# Altium PCB Layout_Power_Supply_V2.PcbDoc
Units mm, origin at the board's own origin, x right, y up, seen from the top; angles counter-clockwise.
Board outline 24.89 x 34.29 mm, 2 copper layers (Top Layer, Bottom Layer); 26 components, 17 nets, 78 pads, 28 vias.
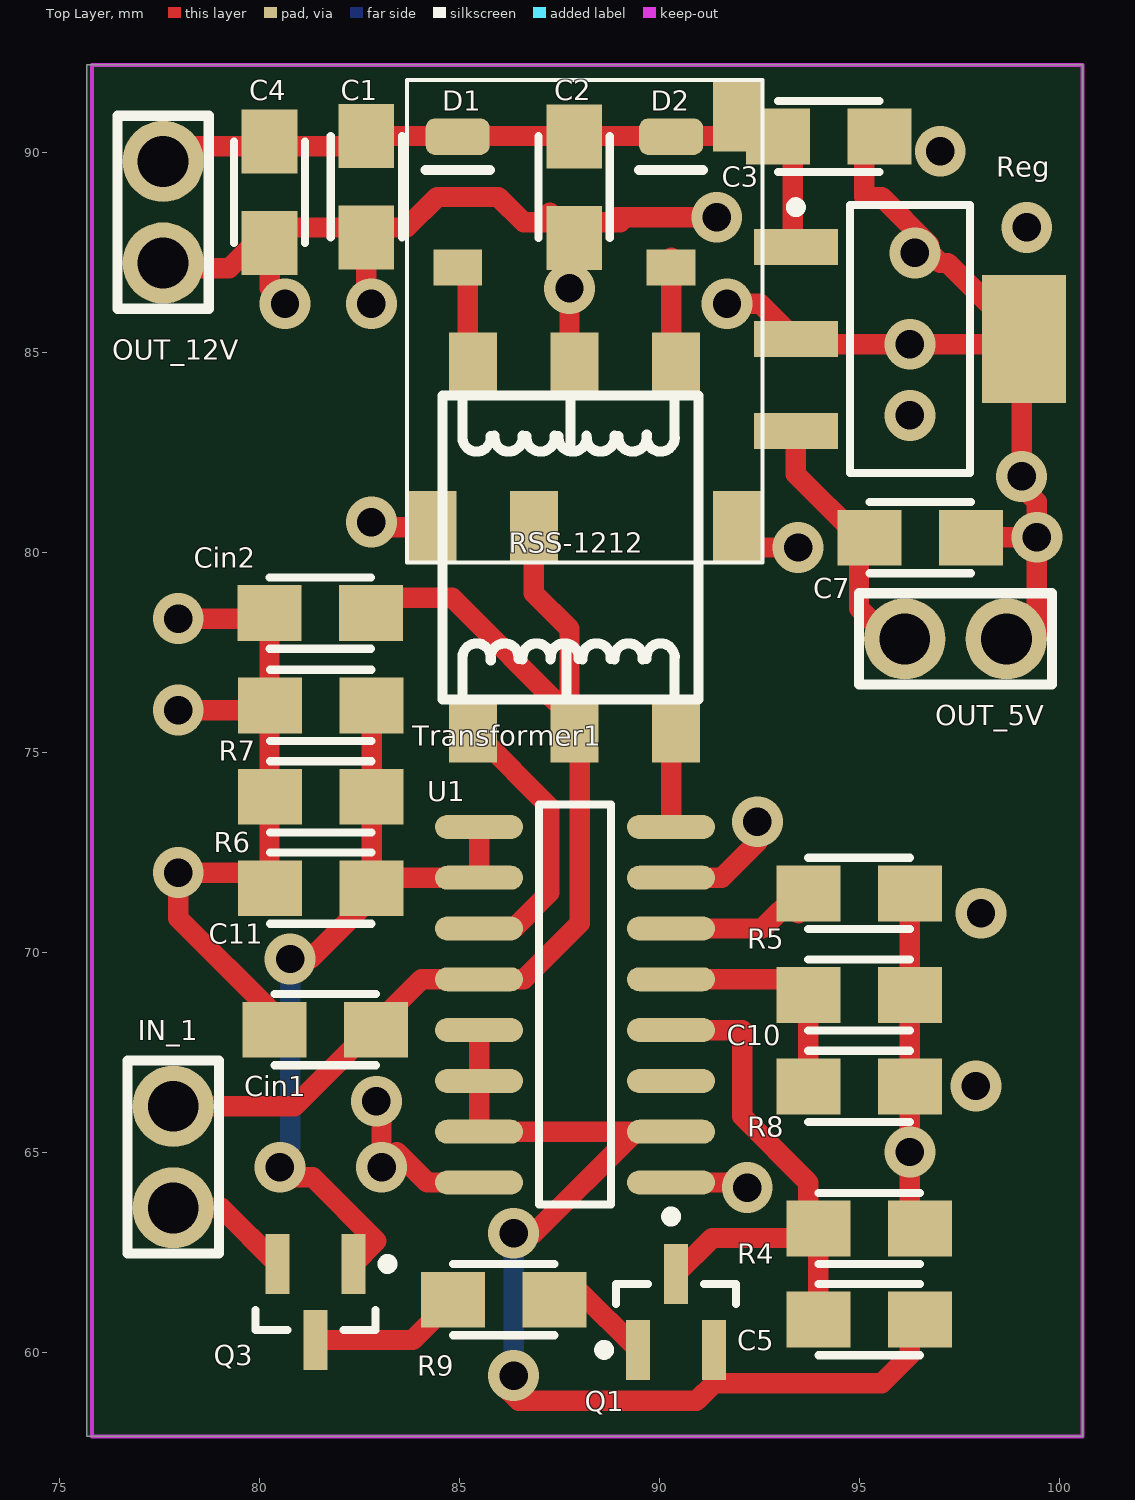
[diagram p0: Top Layer view]
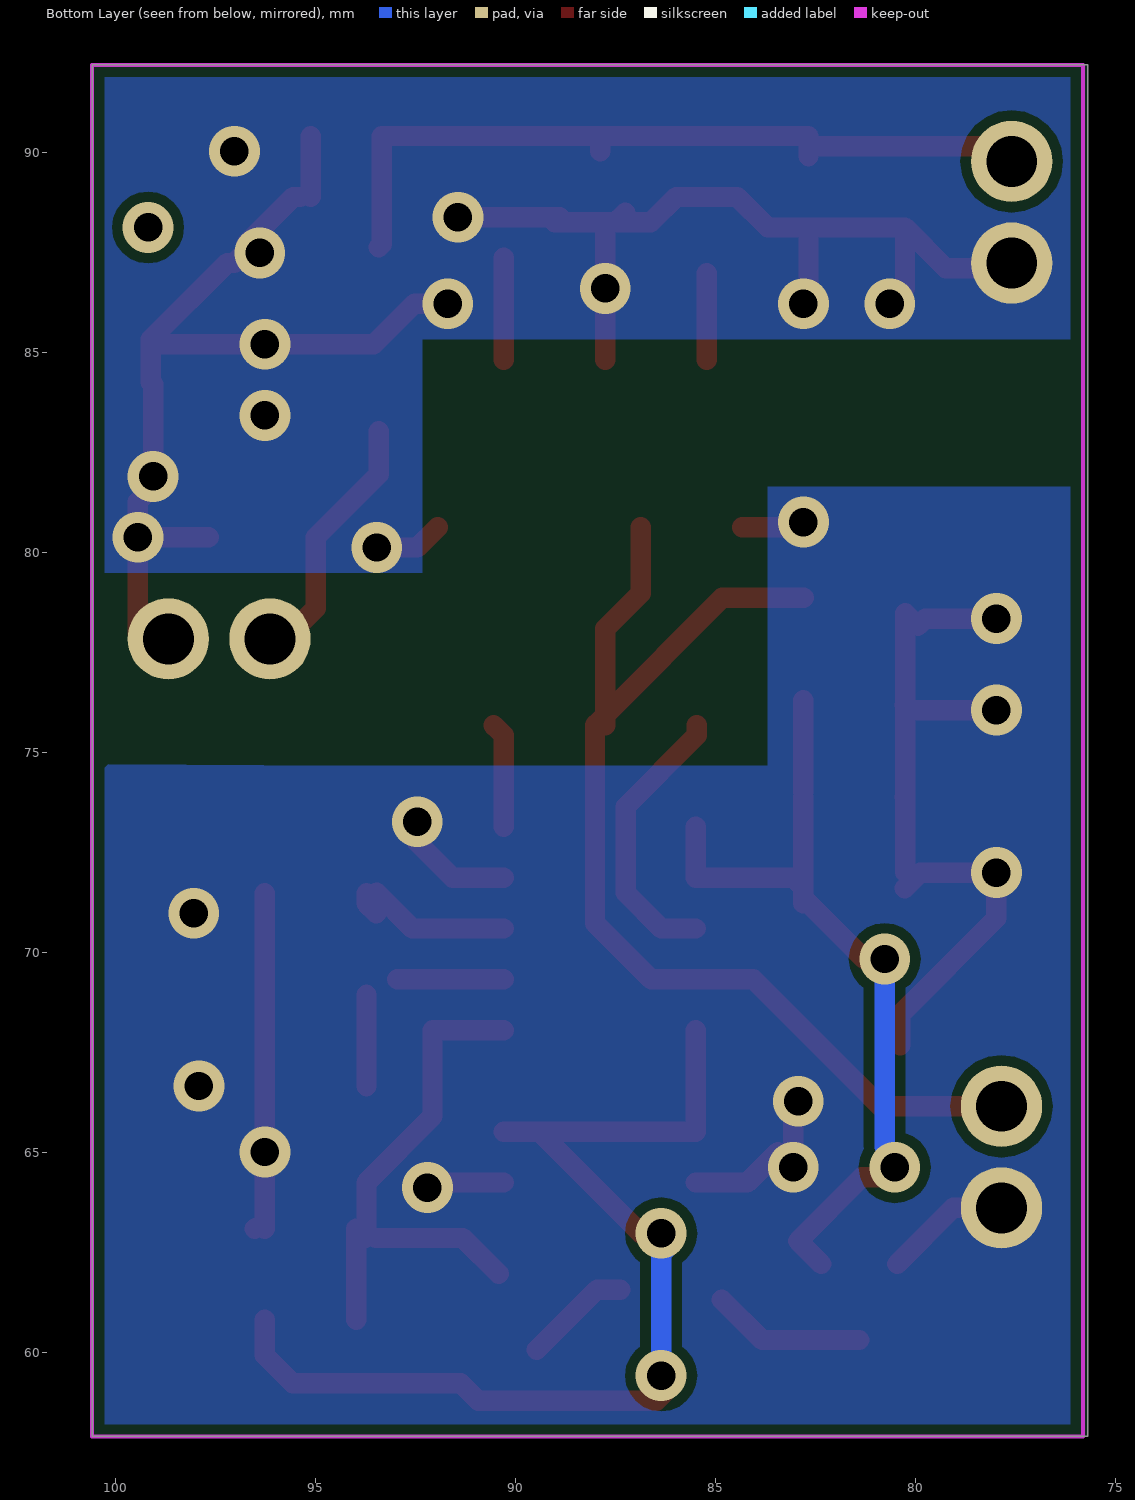
[diagram p1: Bottom Layer view, seen from below]

## Layer stack, top to bottom
Top Solder: solder mask 0.0102, Solder Resist, Dk 3.5
Top Layer: signal copper 0.0356
Dielectric 1: dielectric 0.32, FR-4, Dk 4.8
Bottom Layer: signal copper 0.0356
Bottom Solder: solder mask 0.0102, Solder Resist, Dk 3.5

## Board outline
75.692,57.912 100.584,57.912 100.584,92.202 75.692,92.202

## Design rules (kind name [scope] priority, off if disabled: settings)
Clearance [All] p1: gap=0.254
PlaneClearance PlaneClearance_1 [All] p1: clearance=0.508
PlaneClearance [InNet('GND_IN') And OnLayer('Bottom Layer')] p2: clearance=0.5
PlaneConnect [All] p1: planeconnectstyle=Direct reliefexpansion=0.508 reliefentries=4 reliefconductorwidth=0.254 reliefairgap=0.254
PolygonConnect [All] p1: connectstyle=Direct reliefconductorwidth=0.254 reliefentries=4 polygonreliefangle="90 Angle" airgapwidth=0.254
RoomDefinition Conectors_IsolatedSupply [InComponentClass('Conectors_IsolatedSupply')] p1: confinementstyle=ConfineIn formatcopy=TRUE lockcomponents=FALSE outline 0,25.654 371.602,25.654 371.602,217.687 0,217.687
RoomDefinition isolatedSupply [InComponentClass('isolatedSupply')] p2: confinementstyle=ConfineIn formatcopy=TRUE lockcomponents=FALSE outline 26.035,26.162 332.994,26.162 332.994,126.873 26.035,126.873
RoutingVias [All] p1: holewidth=0.711 width=1.27 viastyle="Through Hole" minholewidth=0.711 minwidth=1.27 maxholewidth=0.711 maxwidth=1.27
SolderMaskExpansion [All] p1: expansion=0.102
Width [All] p1: maxlimit=0.52 minlimit=0.5 preferedwidth=0.51 minimp=50.000000 maximp=50.000000 favimp=50.000000
28 further rules are at their usual default settings.

## Classes and differential pairs
component class Conectors_IsolatedSupply: IN_1 OUT_5V OUT_12V

## Components (designator, comment, footprint, x,y, rotation, side; value= is the part's Value field where it differs from the comment)
C1 "Capacitor_nao_polarizado" 0805_W 82.686,89.161 r270 top
C2 "Capacitor_polarizado" 0805_W 87.884,89.154 r270 top
C3 "Capacitor_nao_polarizado" 0805_W 94.233,90.424 r0 top
C4 "Capacitor_nao_polarizado" 0805_W 80.264,89.028 r270 top
C5 "Cap_0805" 0805_W 95.257,60.824 r180 top
C7 "Capacitor_nao_polarizado" 0805_W 96.52,80.391 r0 top
C10 "Cap_0805" 0805_W 94.989,68.961 r0 top
C11 "Cap_0805" 0805_W 81.534,71.628 r0 top
Cin1 "Cap_0805" 0805_W 81.661,68.072 r180 top
Cin2 "Cap_0805" 0805_W 81.534,78.486 r180 top
D1 "B2-SMD" SOD-123 84.963,88.773 r90 top
D2 "B2-smd" SOD-123 90.297,88.773 r90 top
IN_1 "Header 2" Header2 77.851,63.627 r90 top
OUT_5V "Header 2" Header2 98.679,77.851 r180 top (schematic designator OUT_2)
OUT_12V "Header 2" Header2 77.597,87.249 r90 top (schematic designator OUT_1)
Q1 "BC857" SOT-23-TT3_N 90.424,61.026 r90 top
Q3 "BC847" SOT-23-TT3_N 81.407,61.275 r270 top
R4 "Res_0805" 0805_W 95.257,63.1 r180 top
R5 "Res_0805" 0805_W 95.003,71.482 r180 top
R6 "Res_0805" 0805_W 81.534,73.914 r0 top
R7 "Res_0805" 0805_W 81.534,76.2 r0 top
R8 "Res_0805" 0805_W 95.003,66.656 r180 top
R9 "Res_0805" 0805_W 86.106,61.341 r0 top
Reg "LM7805" SOT223 96.266,85.344 r0 top
Transformer1 "WE-PP" Trafo 87.884,80.137 r90 top
U1 "TL494ID" SOIC16_N 87.897,68.707 r180 top

## Footprints (in the part's own frame and the unit in brackets; to place one, negate y for a bottom-side part, rotate by r counter-clockwise, add the part's x,y. Pads: shape width x height; smd on the part's side, far side on the other; paste and mask are expansions set on the pad)
0805_W [mm]
  rect 1.6x1.397 smd: 1(-1.263,-0.009) 2(1.277,-0.009)
  silkscreen extent -1.26,-0.9 1.28,0.88
Header2 [mil]
  round 80 hole 50: 1(0,0) 2(100,0)
  silkscreen extent -45,-45 145,45
SOD-123 [mm] "Diodo"
  rect 0.91x1.22 smd: 1(-1.635,0)
  rrect50% 0.91x1.6 smd: 2(1.635,0)
  silkscreen extent 0.8,-0.8 0.8,0.8
SOIC16_N [mm] "SOIC, 16-Leads, Body 9.9x3.9mm, Pitch 1.27mm, IPC Medium Density"
  oval 2.2x0.6 smd: 1(-2.4,4.445) 2(-2.4,3.175) 3(-2.4,1.905) 4(-2.4,0.635) 5(-2.4,-0.635) 6(-2.4,-1.905) 7(-2.4,-3.175) 8(-2.4,-4.445) 9(2.4,-4.445) 10(2.4,-3.175) 11(2.4,-1.905) 12(2.4,-0.635) 13(2.4,0.635) 14(2.4,1.905) 15(2.4,3.175) 16(2.4,4.445)
  silkscreen extent -2.53,-5 0.9,5.42, body extent -2,-5 2,5, height 1.91
SOT223 [mm] "large"
  rect 2.1x0.9 smd: 1(-2.85,0) 2(-2.85,-2.3) 3(-2.85,2.3)
  rect 2.1x3.2 smd: 1(2.85,0)
  silkscreen extent -2.97,-3.35 1.5,3.42, body extent -1.85,-3.35 1.85,3.35, height 1.7
SOT-23-TT3_N [mm] "SOT23, 3-Leads, Body 2.9x1.3mm, Pitch 0.95mm, Lead Span 2.4mm, IPC Medium Density"
  rect 1.5x0.6 smd: 1(-0.95,0.95) 2(-0.95,-0.95) 3(0.95,0)
  silkscreen extent -1.07,-1.5 0.7,1.92, body extent -0.7,-1.5 0.7,1.5, height 1.12
Trafo [mm] "transformador smd TI"
  rect 1.6x1.2 smd: 1(-4.57,2.54) 2(-4.57,0) 3(-4.57,-2.54) 4(4.57,-2.54) 5(4.57,0) 6(4.57,2.54)
  silkscreen extent -3.8,-3.1 3.8,3.3

## Part data
C1 C3 C4 C7: "Capacitor nao polarizado"
C2: "Capacitor polarizado"
C5 C10 C11 Cin1 Cin2: "Capacitor"
D1 D2: library part Schottky, "Diodo Schottky"
IN_1 OUT_5V OUT_12V: "Header, 2-Pin"
Q1: "PNP General-purpose Transistor"
Q3: "NPN General-purpose Transistor"
R4 R5 R6 R7 R8 R9: "Resistor"
Transformer1: library part Trafo-TI
U1: "Pulse-Width-Modulation Control Circuit"

## Free pads (board coordinates)
  rect 1.2x1.8 smd: 2(91.948,90.932) 3(91.948,80.645) 4(86.868,80.645) 5(84.328,80.645)

## Via types
v1: diameter 1.27, hole 0.711, Top Layer to Bottom Layer, 28 vias

## Nets (pads, with @x,y where several pads share a name; then routed paths per layer and width w, separated by ;. In a path a pad name is that pad's centre, name@x,y a point inside that pad or via, vN(x,y) a via of type N, cw(c..) or ccw(c..) an arc to the next point about the centre after c; other vN are vias at no path point)
5V_REF: C5.1 Q1.2 U1.2 U1.13 U1.14 U1.15 | length 27.2
  Top Layer w0.51: U1.13 U1.14 U1.15 U1.2@89.408,65.532 ; v1(86.36,59.436) 86.106,59.182 86.487,58.801 90.932,58.801 91.374,59.243 95.565,59.243 96.266,59.944 C5.1@96.266,60.833 ; v1(86.36,62.992) 86.868,62.992 U1.2@89.408,65.532 ; U1.2 U1.2@89.408,65.532
  Bottom Layer w0.51: v1(86.36,59.436) 86.36,62.484 86.106,62.738 v1(86.36,62.992)
+5V_ISO: C7.1 OUT_5V.2 Reg.2 | length 6.9
  Top Layer w0.51: Reg.2 93.416,81.969 94.994,80.391 94.994,78.615 OUT_5V.2@96.266,77.343
CT: C10.1 R8.2 U1.5 | length 4.9
  Top Layer w0.51: U1.5 C10.1@92.955,69.342 ; R8.2 C10.1
DT_CON: C5.2 Q1.3 R4.2 U1.4 | length 13.5
  Top Layer w0.51: U1.4 92.075,68.072 92.075,65.913 93.726,64.262 R4.2@93.726,63.11 ; Q1.3 91.322,62.874 R4.2@93.491,62.874 ; R4.2@93.745,62.874 R4.2 C5.2
FEEDBACK: U1.3
GND_IN: C10.2 C11.1 Cin1.2 Cin2.2 IN_1.1 pad.5 Q3.2 R4.1 R5.1 R6.1 R7.1 R8.1 U1.1 U1.7 U1.16 | length 41.3
  Top Layer w0.51: IN_1.1 79.055,63.627 Q3.2 ; v1(77.978,76.073) 80.153,76.073 R7.1@80.257,76.177 ; v1(77.978,78.359) 79.756,78.359 79.938,78.177 Cin2.2 R7.1@80.257,76.177 ; C11.1@80.257,72.016 R6.1@80.257,73.914 ; C11.1 79.88,72.009 v1(77.978,72.009) 77.978,70.869 80.384,68.462 Cin1.2 Cin1.2@80.384,67.698 ; R6.1 80.261,73.914 R6.1@80.257,73.914 ; R7.1 R7.1@80.257,76.177 ; v1(82.804,80.772) 82.931,80.645 pad.5 ; v1(82.931,66.294) 83.058,66.167 v1(83.058,64.643) ; v1@83.439,65.024 84.201,64.262 U1.16 ; U1.1 92.075,64.262 v1(92.202,64.135) ; U1.7 91.567,71.882 92.456,72.771 v1(92.456,73.279) ; R4.1@96.266,63.11 v1(96.266,65.024) R8.1 C10.2 R5.1 ; R4.1@96.511,63.119 R4.1 ; R6.1@80.257,73.914 R7.1@80.257,76.177
  other v1: 97.917,66.675 98.044,70.993
GND_ISO: C1.2 C2.2 C3.2 C4.2 C7.2 OUT_5V.1 OUT_12V.1 pad.3 Reg.1 Transformer1.5 | length 50.2
  Top Layer w0.51: OUT_12V.1@77.343,87.122 79.248,87.122 C4.2@80.264,88.138 ; v1(80.645,86.233) 80.264,86.614 C4.2@80.264,88.138 ; v1(82.804,86.233) 82.677,86.36 C1.2 C1.2@82.677,88.138 ; C2.2@87.262,88.506 C2.2@87.503,88.265 ; Transformer1.5@87.757,84.834 v1(87.757,86.614) 87.757,88.137 C2.2@87.884,88.264 ; v1(91.44,88.392) 88.898,88.392 89.026,88.264 C2.2@87.884,88.264 ; v1(91.694,86.233) 92.527,86.233 93.416,85.344 93.543,85.217 v1(96.266,85.217) 98.989,85.217 Reg.1@99.116,85.344 ; pad.3 92.456,80.137 v1(93.472,80.137) ; 95.123,88.9 C3.2@95.123,90.424 ; 95.377,88.9 95.56,88.9 v1@96.738,87.722 ; v1@96.52,87.757 97.028,87.249 97.211,87.249 Reg.1@99.116,85.344 ; C7.2@97.663,80.391 v1(99.441,80.391) ; OUT_5V.1@98.806,77.343 99.441,77.978 v1(99.441,80.391) ; C4.2@80.264,88.138 C1.2@82.677,88.138 ; C1.2@82.677,88.138 83.693,88.138 84.455,88.9 85.979,88.9 86.615,88.264 C2.2@87.884,88.264 ; Reg.1@99.116,85.344 99.116,84.272 99.06,84.216 v1(99.06,81.915) 98.933,81.788 99.441,81.28 v1(99.441,80.391)
  other v1: 96.266,83.439 96.393,87.503 97.028,90.043
I_FB: C11.2 Q3.1 R6.2 R7.2 U1.9 U1.10 | length 21
  Top Layer w0.51: v1@80.518,64.389 81.341,64.389 82.931,62.799 Q3.1 ; v1(80.772,69.85) 81.026,69.85 81.153,69.977 81.28,69.85 C11.2@82.804,71.374 ; C11.2@82.804,71.247 C11.2@82.804,71.374 ; R6.2 82.811,71.889 C11.2@82.804,71.882 ; R6.2@82.811,74.032 R7.2 R7.2@82.811,76.318 ; C11.2@82.931,71.755 C11.2@82.804,71.882 ; C11.2@82.931,71.882 U1.10 U1.9 ; C11.2@82.804,71.374 C11.2@82.804,71.882
  Bottom Layer w0.51: v1(80.518,64.643) 80.391,64.77 80.772,65.151 v1(80.772,69.85)
NetD1_1: D1.1 Transformer1.6 | length 2.2
  Top Layer w0.51: Transformer1.6@85.217,84.834 D1.1@85.217,86.995
NetD2_1: D2.1 Transformer1.4 | length 2.5
  Top Layer w0.51: Transformer1.4@90.297,84.834 D2.1 D2.1@90.297,87.376
NetQ1_1: Q1.1 R9.2 | length 2.7
  Top Layer w0.51: R9.2@87.383,61.586 87.964,61.586 Q1.1
NetQ3_3: Q3.3 R9.1 | length 3.9
  Top Layer w0.51: Q3.3 83.836,60.325 R9.1
NetR5_2: R5.2 U1.6 | length 4.1
  Top Layer w0.51: U1.6 92.583,70.612 R5.2@93.472,71.501 ; R5.2@93.481,70.993 93.726,71.238 R5.2
NetTransformer1_1: Transformer1.1 U1.11 | length 7
  Top Layer w0.51: Transformer1.1@85.471,75.694 85.471,75.438 87.249,73.66 87.249,71.501 86.36,70.612 U1.11
NetTransformer1_3: Transformer1.3 U1.8 | length 2.6
  Top Layer w0.51: U1.8 90.297,75.44 Transformer1.3 Transformer1.3@90.551,75.694
VIN: Cin1.1 Cin2.1 IN_1.2 pad.4 Transformer1.2 U1.12 | length 28.7
  Top Layer w0.51: IN_1.2 80.883,66.167 84.058,69.342 U1.12 86.614,69.342 88.013,70.741 88.013,75.692 Transformer1.2@87.884,75.821 ; Cin2.1@82.797,78.876 84.829,78.876 Transformer1.2@87.757,75.948 ; pad.4 86.868,78.994 87.757,78.105 Transformer1.2@87.757,75.948 ; Transformer1.2@87.757,75.694 Transformer1.2@87.757,75.948
VOUT: C1.1 C2.1 C3.1 C4.1 D1.2 D2.2 OUT_12V.2 pad.2 Reg.3 | length 19.5
  Top Layer w0.51: OUT_12V.2@77.343,89.662 77.851,90.17 82.677,90.17 C1.1@82.677,89.918 ; C1.1 93.343,90.424 93.343,87.717 Reg.3 ; C2.1@87.884,90.044 C2.1@87.884,90.298
copper on no net:
  other v1: 99.187,88.138

## Polygon pours and split planes (outlines as drawn)
GND_ISO on Bottom Layer "Bottom Layer-GND_IN" (solid, pour order 2): 75.692,85.344 92.329,85.344 92.329,79.502 100.457,79.502 100.457,92.075 75.692,92.075
GND_IN on Bottom Layer "Bottom Layer-GND_IN" (solid, pour order 0): 75.945,57.912 100.457,57.912 100.457,74.724 94.34,74.677 83.693,74.677 83.693,81.661 75.945,81.661

## Keep-outs
Keep-Out Layer:
  lines w0.1: 75.819,57.912 100.584,57.912 100.584,92.202 75.819,92.202 75.819,57.912

## Silkscreen, mask and mechanical layers (free items; w line width, h text height)
Top Overlay:
  lines w0.1: 83.693,79.756 83.693,91.821 92.583,91.821 92.583,79.756 83.693,79.756
  text "RSS-1212" at 86.233,80.01 h0.5